# EAGLE board GROUP 6 IT LEVEL 3 (EAGLE 7.6.0)

Size 73.58 x 63.39 mm. Coordinates in mm from the lower left corner, seen from the top.
Outline: 0,0 56.82,0 56.82,53.33 0,53.33 0,0
Copper layers (1*16): Top 0.035mm / dielectric 1.5mm / Bottom 0.035mm
Design rules "default": minimum track width 10mil, minimum drill 24mil, track to track 8mil, track to pad 8mil, pad to pad 8mil, via to via 8mil, smd to smd 8mil, copper to edge 40mil, drill to drill 8mil, minimum pad ring 10mil, minimum via ring 8mil, stop-mask expansion 4mil, vias tented up to drill 0mil, thermal gap 10mil

## Footprints (pad centres in the part's own frame; a part is rotated, then mirrored left to right if it is on the bottom)
LED5MM = drill 0.813 octagon: A -1.27,0; K 1.27,0
0207/10 = drill 0.813 octagon: 1 -5.08,0; 2 5.08,0
ARDUINO_UNO = drill 1.016 pad 1.88: 0 63.5,50.8; 1 60.96,50.8; 2 58.42,50.8; 3 55.88,50.8; 3.3V 35.56,2.54; 4 53.34,50.8; 5 50.8,50.8; 5V 38.1,2.54; 6 48.26,50.8; 7 45.72,50.8; 8 41.656,50.8; 9 39.116,50.8; 10 36.576,50.8; 11 34.036,50.8; 12 31.496,50.8; 13 28.956,50.8; A0 50.8,2.54; A1 53.34,2.54; A2 55.88,2.54; A3 58.42,2.54; A4 60.96,2.54; A5 63.5,2.54; AREF 23.876,50.8; GND 26.416,50.8; GND. 43.18,2.54; GND.. 40.64,2.54; I/OREF 30.48,2.54; N/C 27.94,2.54; RESET 33.02,2.54; SCL 18.796,50.8; SDA 21.336,50.8; VIN 45.72,2.54 | hole 3.2: 66.04,7.62; 66.04,35.56; 15.24,50.8; 13.97,2.54

## Placement (x,y rotation side)
D1  [LED5MM]  5,22.78 0 top
D2  [LED5MM]  5,35.48 0 top
D3  [LED5MM]  5,48.18 0 top
D4  [LED5MM]  5,289.48 0 top  (outside the outline)
D5  [LED5MM]  5,302.18 0 top  (outside the outline)
D6  [LED5MM]  5,314.88 0 top  (outside the outline)
D7  [LED5MM]  5,60.88 0 top
D8  [LED5MM]  5,73.58 0 top  (outside the outline)
D9  [LED5MM]  5,276.78 0 top  (outside the outline)
D10  [LED5MM]  5,86.28 0 top  (outside the outline)
D11  [LED5MM]  5,98.98 0 top  (outside the outline)
D13  [LED5MM]  5,111.68 0 top  (outside the outline)
R1  1‎Ω  [0207/10]  5,124.38 0 top  (outside the outline)
R2  1‎Ω  [0207/10]  5,137.08 0 top  (outside the outline)
R3  1‎Ω  [0207/10]  5,149.78 0 top  (outside the outline)
R4  1‎Ω  [0207/10]  5,162.48 0 top  (outside the outline)
R5  1‎Ω  [0207/10]  5,200.58 0 top  (outside the outline)
R6  1‎Ω  [0207/10]  5,175.18 0 top  (outside the outline)
R7  1‎Ω  [0207/10]  5,187.88 0 top  (outside the outline)
R8  1‎Ω  [0207/10]  5,213.28 0 top  (outside the outline)
R9  1‎Ω  [0207/10]  5,225.98 0 top  (outside the outline)
R10  1‎Ω  [0207/10]  5,238.68 0 top  (outside the outline)
R11  1‎Ω  [0207/10]  5,251.38 0 top  (outside the outline)
R12  1‎Ω  [0207/10]  5,264.08 0 top  (outside the outline)
U1  [ARDUINO_UNO]  5,10.08 0 top

## Library data of the parts
D1-D11 D13 R1-R12 U1 = AUTODESK_CIRCUITS_BREADBOARD

## Nets
N$1: D8.K R2.2
N$2: D2.K R4.2
N$3: D9.K R7.2
N$4: D1.K R3.2
N$5: D3.K R6.2
N$6: D4.K D5.K D6.K D10.K D11.K D13.K R1.1 R2.1 R3.1 R4.1 R5.1 R5.2 R6.1 R7.1 R8.1 R8.2 R9.1 R9.2 R10.1 R10.2 R11.1 R11.2 R12.1 R12.2 U1.GND
N$7: D13.A U1.0
N$8: D11.A U1.1
N$9: D10.A U1.2
N$10: D7.A U1.12
N$11: D8.A U1.11
N$12: D9.A U1.10
N$13: D6.A U1.9
N$14: D5.A U1.8
N$15: D4.A U1.7
N$16: D7.K R1.2
N$17: D1.A U1.5
N$18: D2.A U1.4
N$19: D3.A U1.3

## Tracks (layer width: path | path; a pad name or v marks a point on that pad's centre or on a via)
N$1  (1 unrouted)
N$2  (1 unrouted)
N$3  (1 unrouted)
N$4  (1 unrouted)
N$5  (1 unrouted)
N$6  (24 unrouted)
N$7  (1 unrouted)
N$8  (1 unrouted)
N$9  (1 unrouted)
N$10  (1 unrouted)
N$11  (1 unrouted)
N$12  (1 unrouted)
N$13  (1 unrouted)
N$14  (1 unrouted)
N$15  (1 unrouted)
N$16  (1 unrouted)
N$17  (1 unrouted)
N$18  (1 unrouted)
N$19  (1 unrouted)